# Altium PCB AMT103 Encoder Interface.PcbDoc
Units mm, origin at the board's own origin, x right, y up, seen from the top; angles counter-clockwise.
Board outline 39 x 30 mm, 4 copper layers (Components, GND, Supplies, Signals), stack 1.566 mm thick; 46 components, 37 nets, 200 pads, 95 vias.
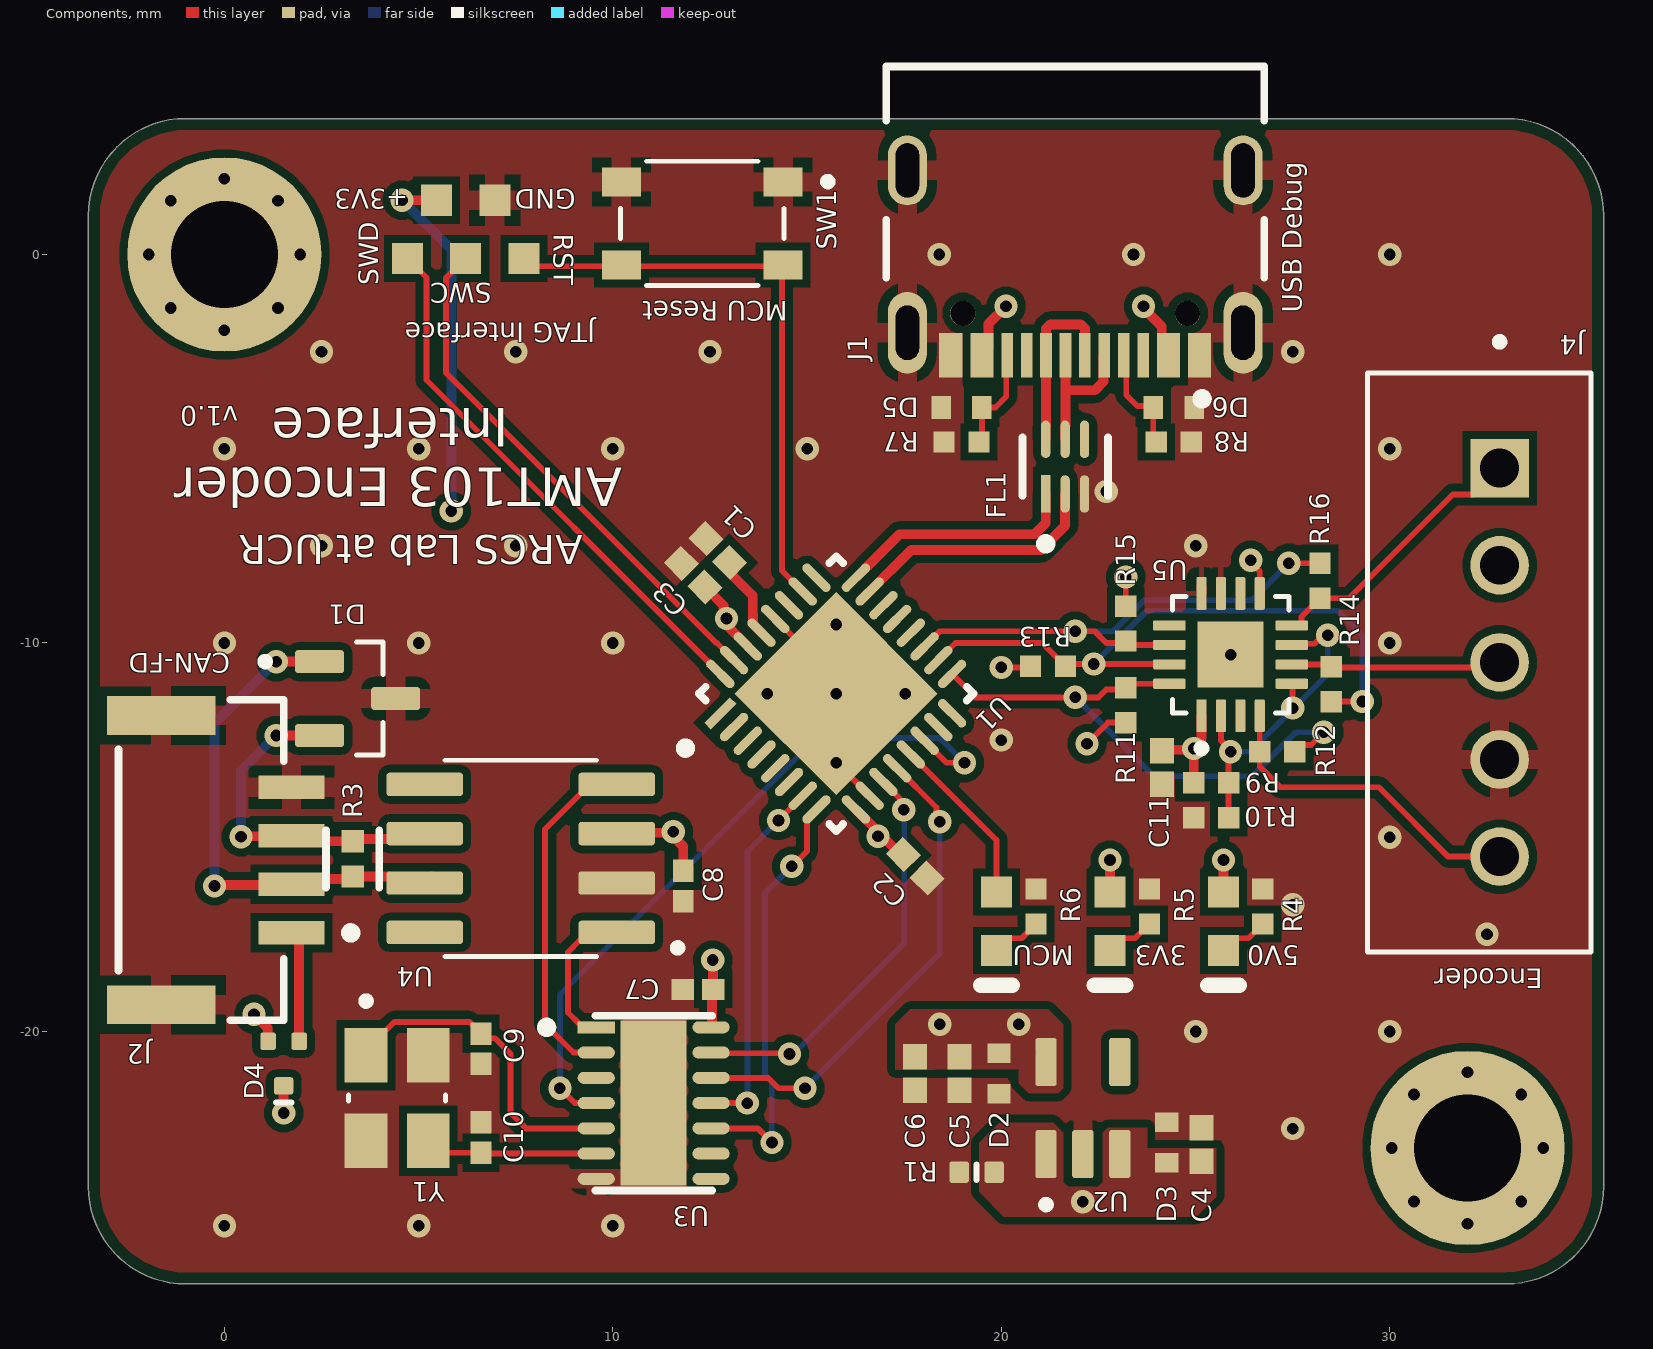
[diagram p0: Components view]
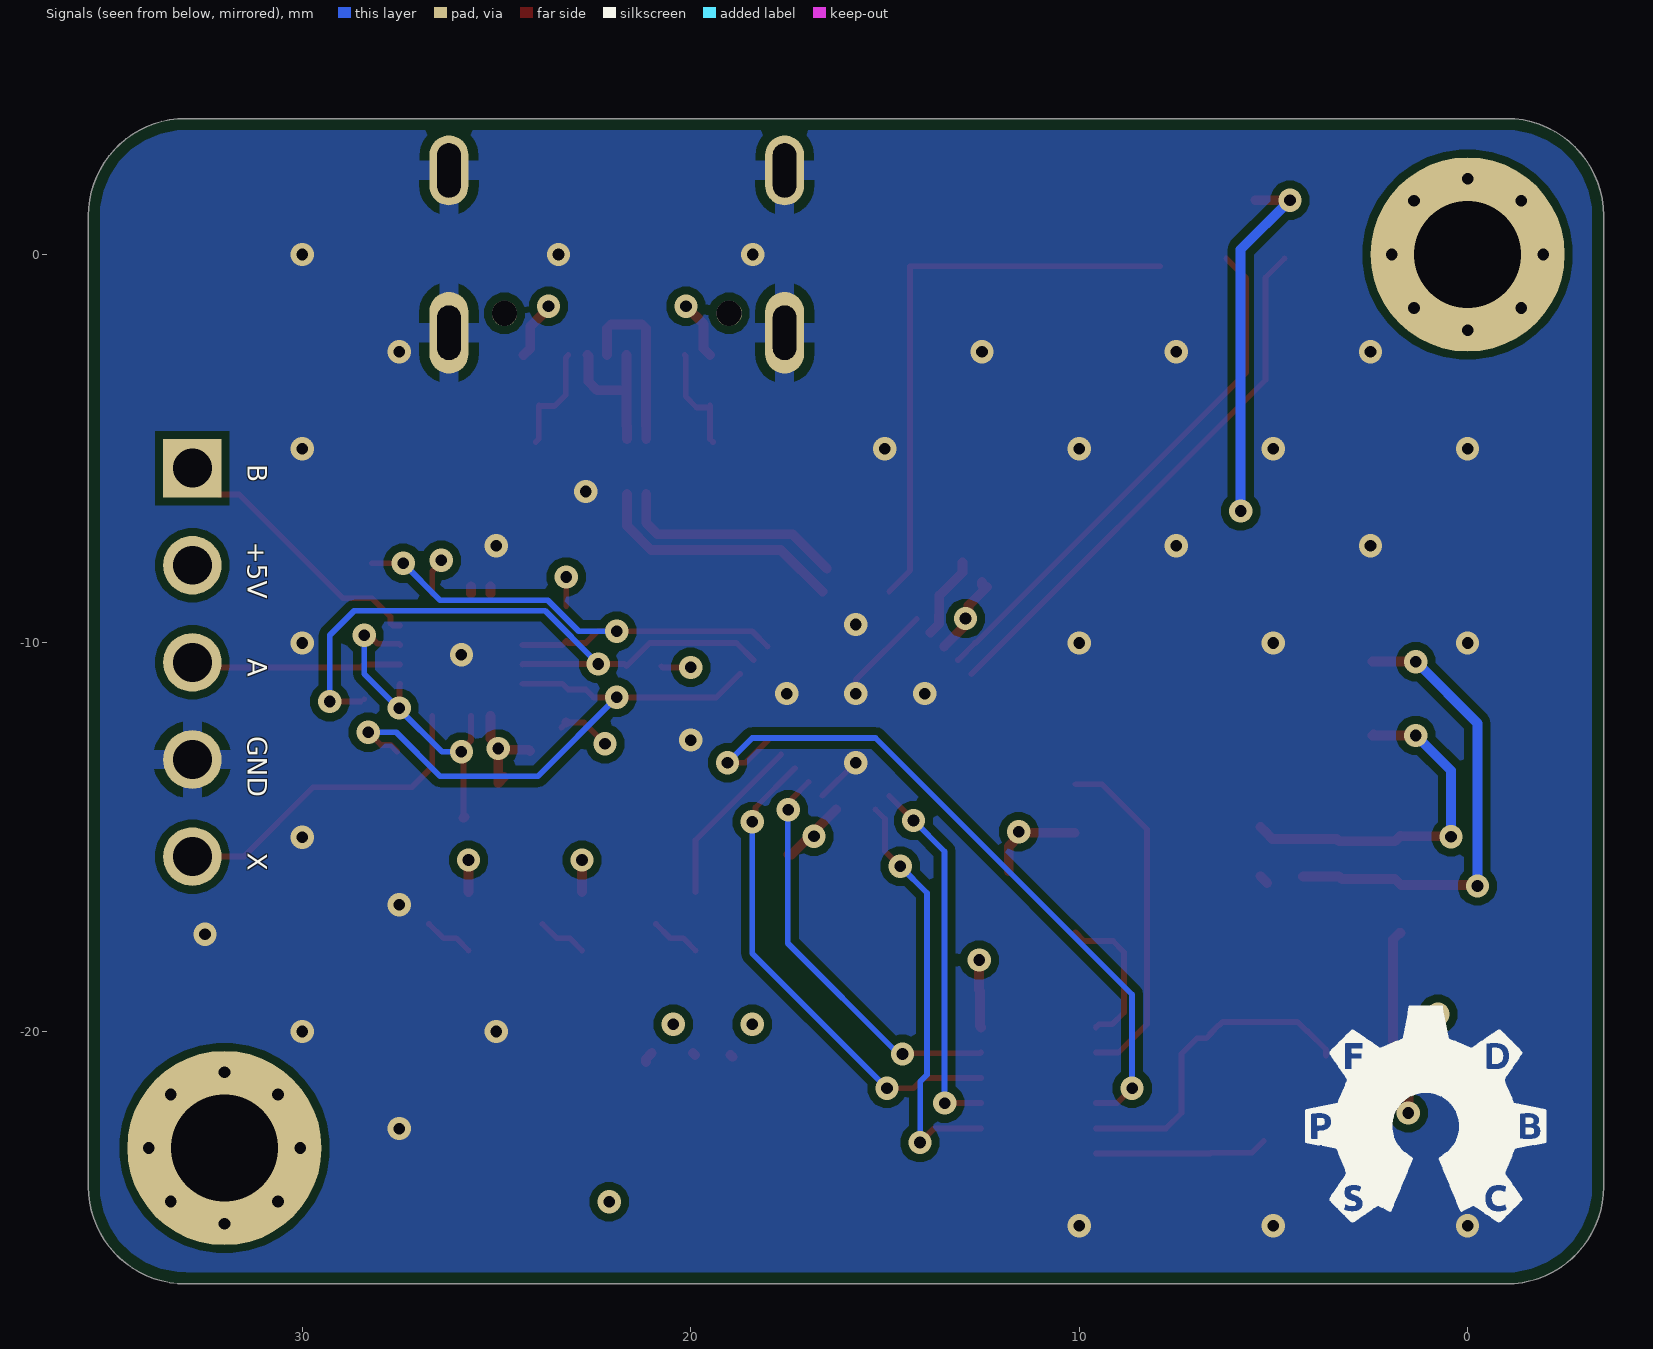
[diagram p1: Signals view, seen from below]
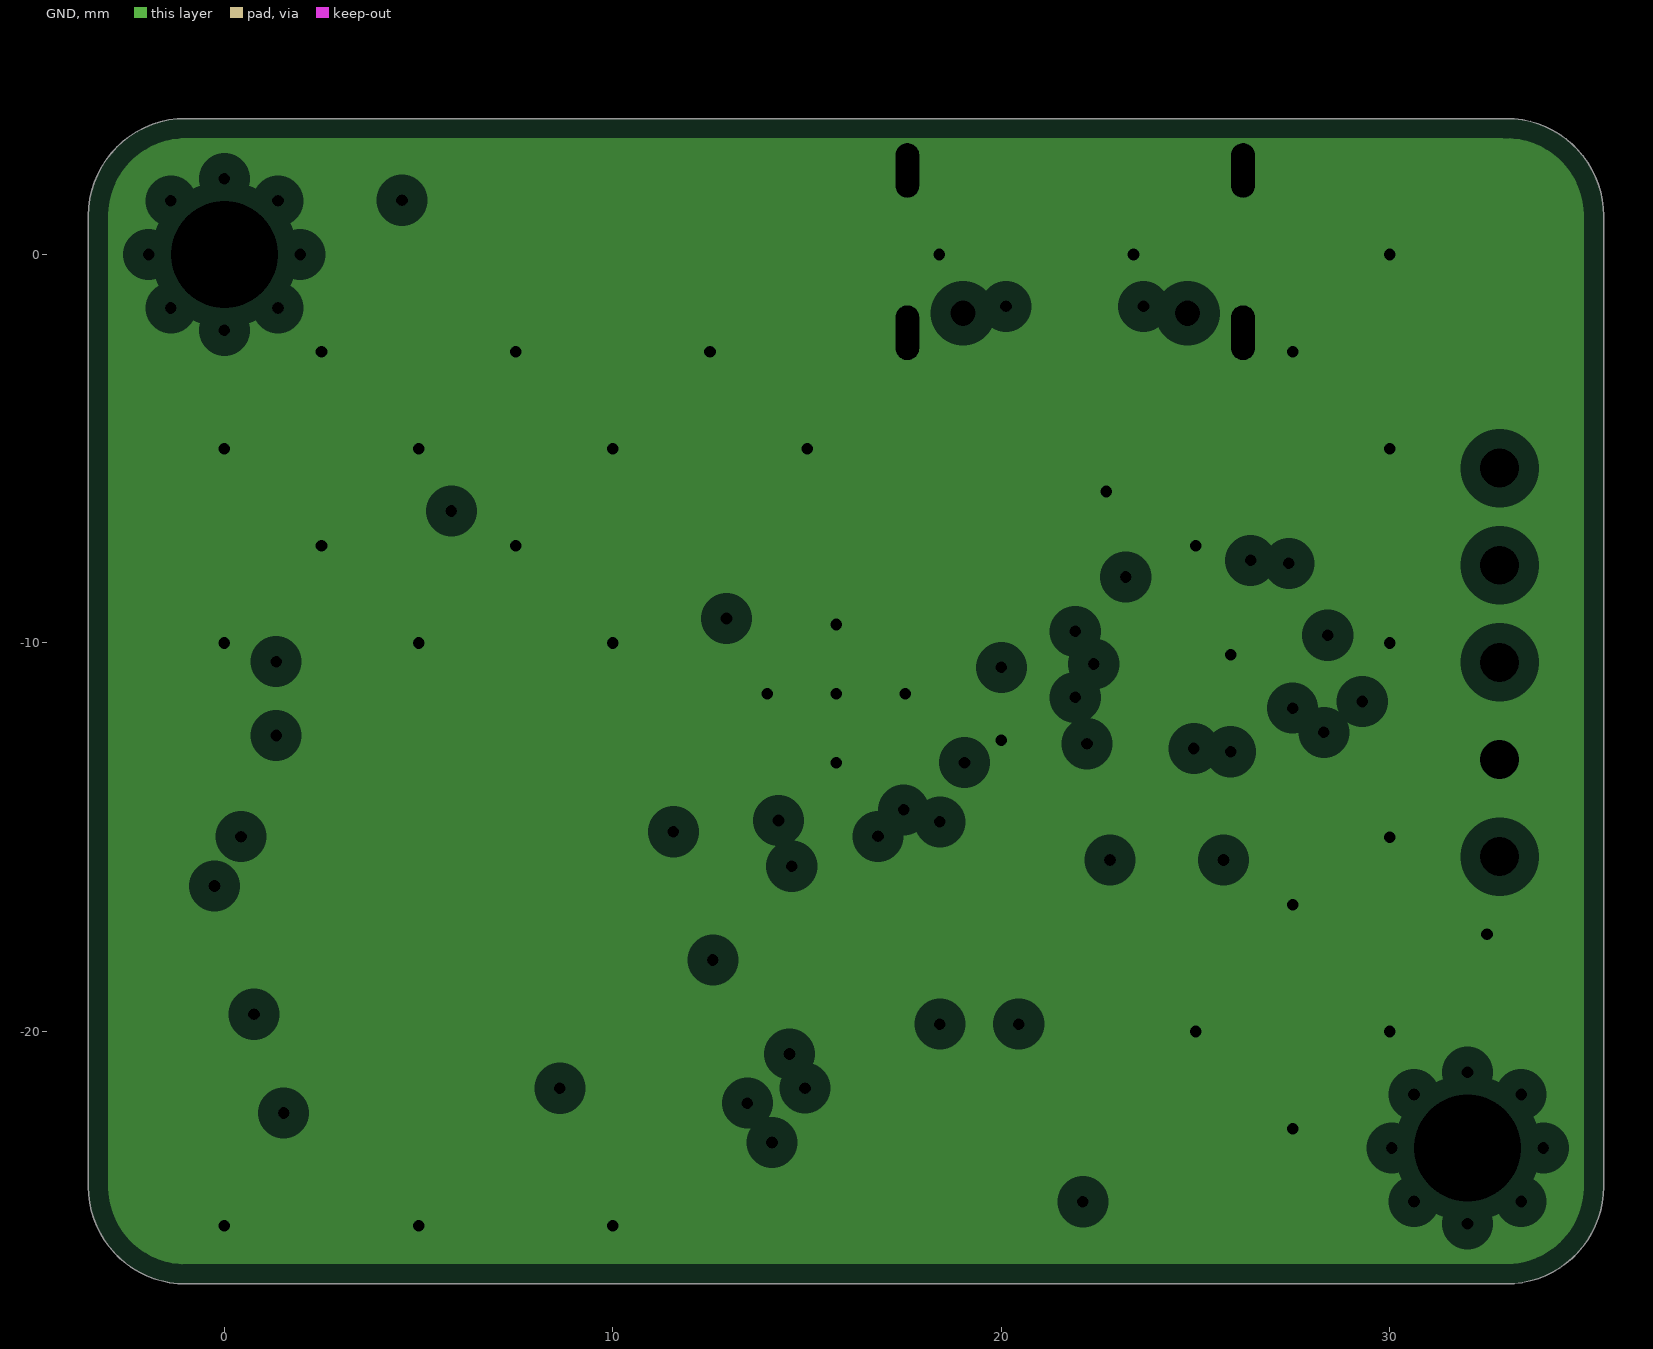
[diagram p2: GND, clearances drawn from the general rule]
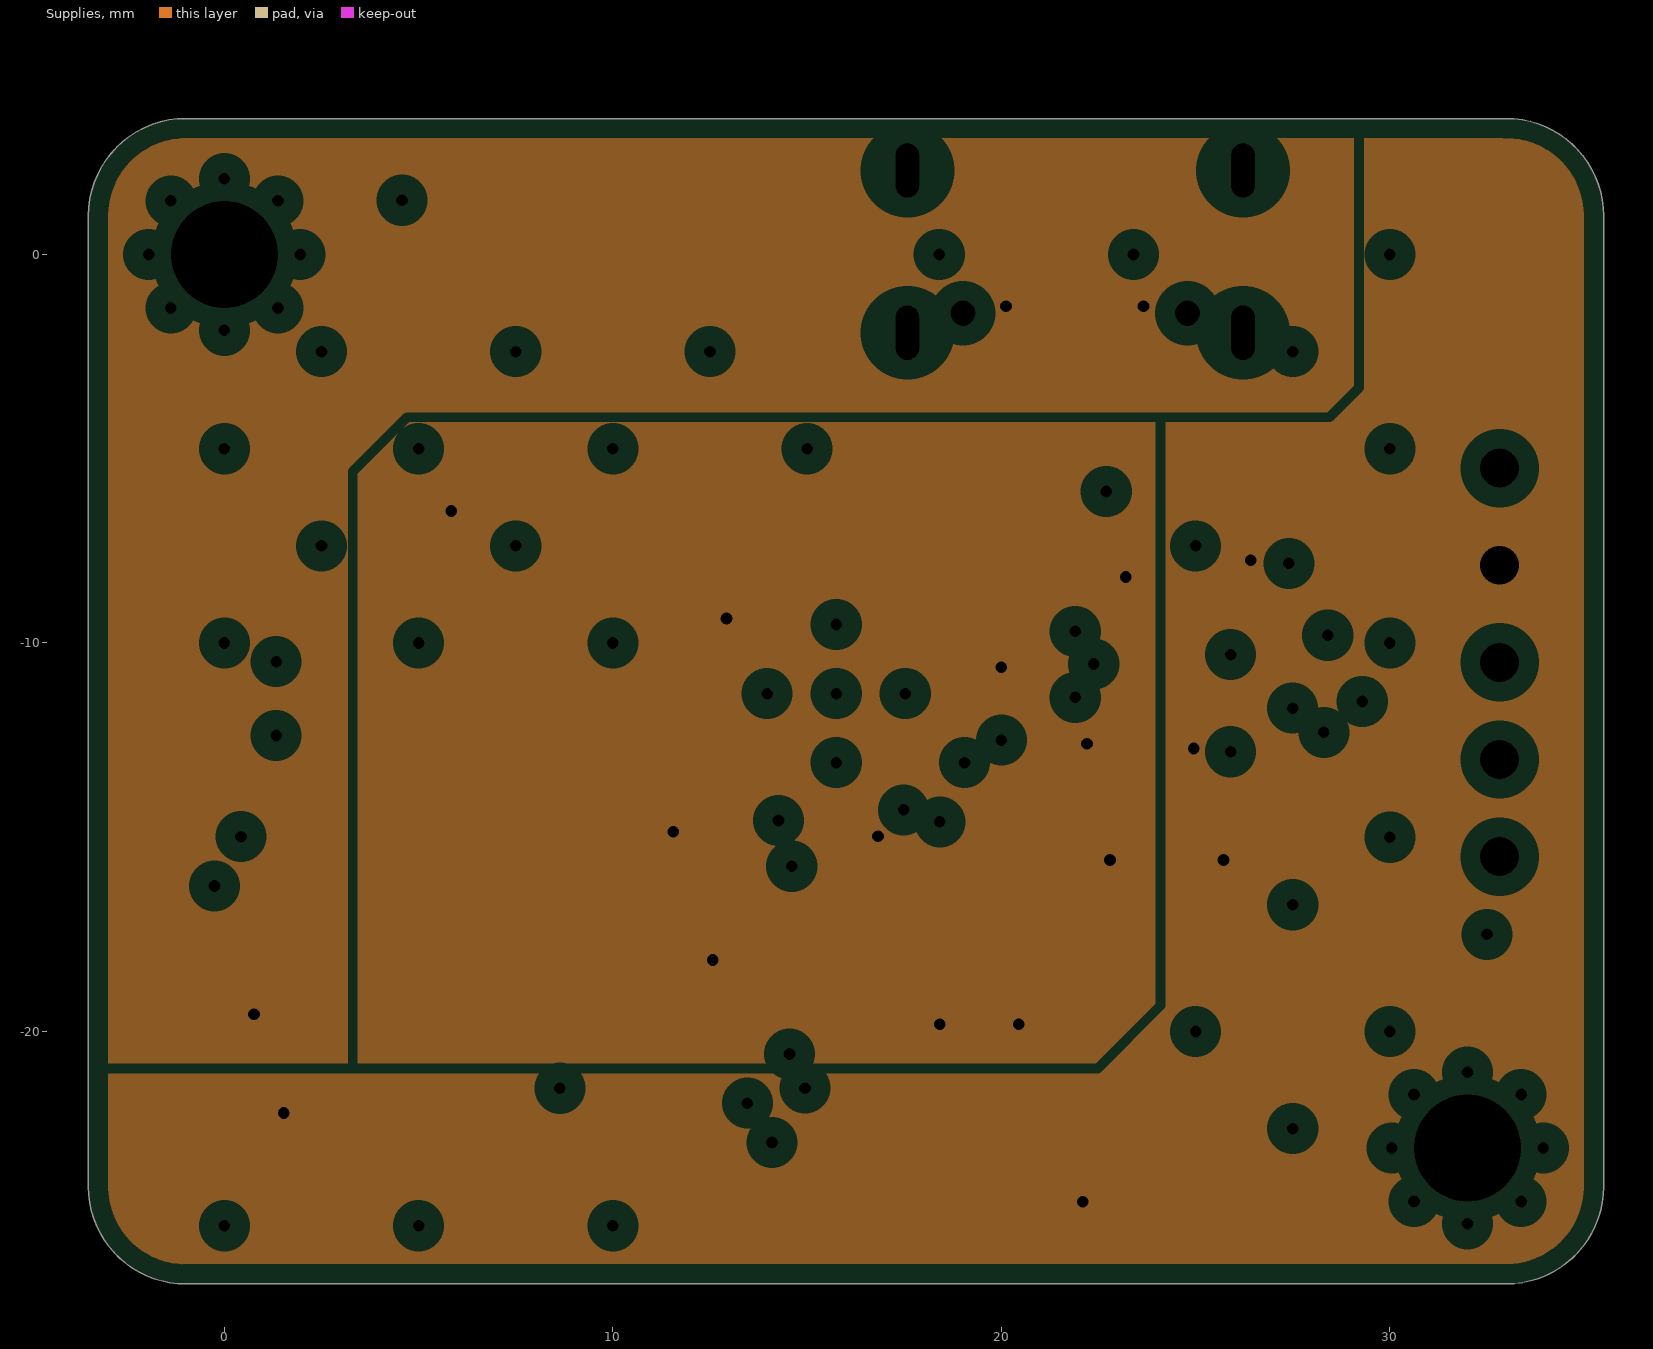
[diagram p3: Supplies, clearances drawn from the general rule]
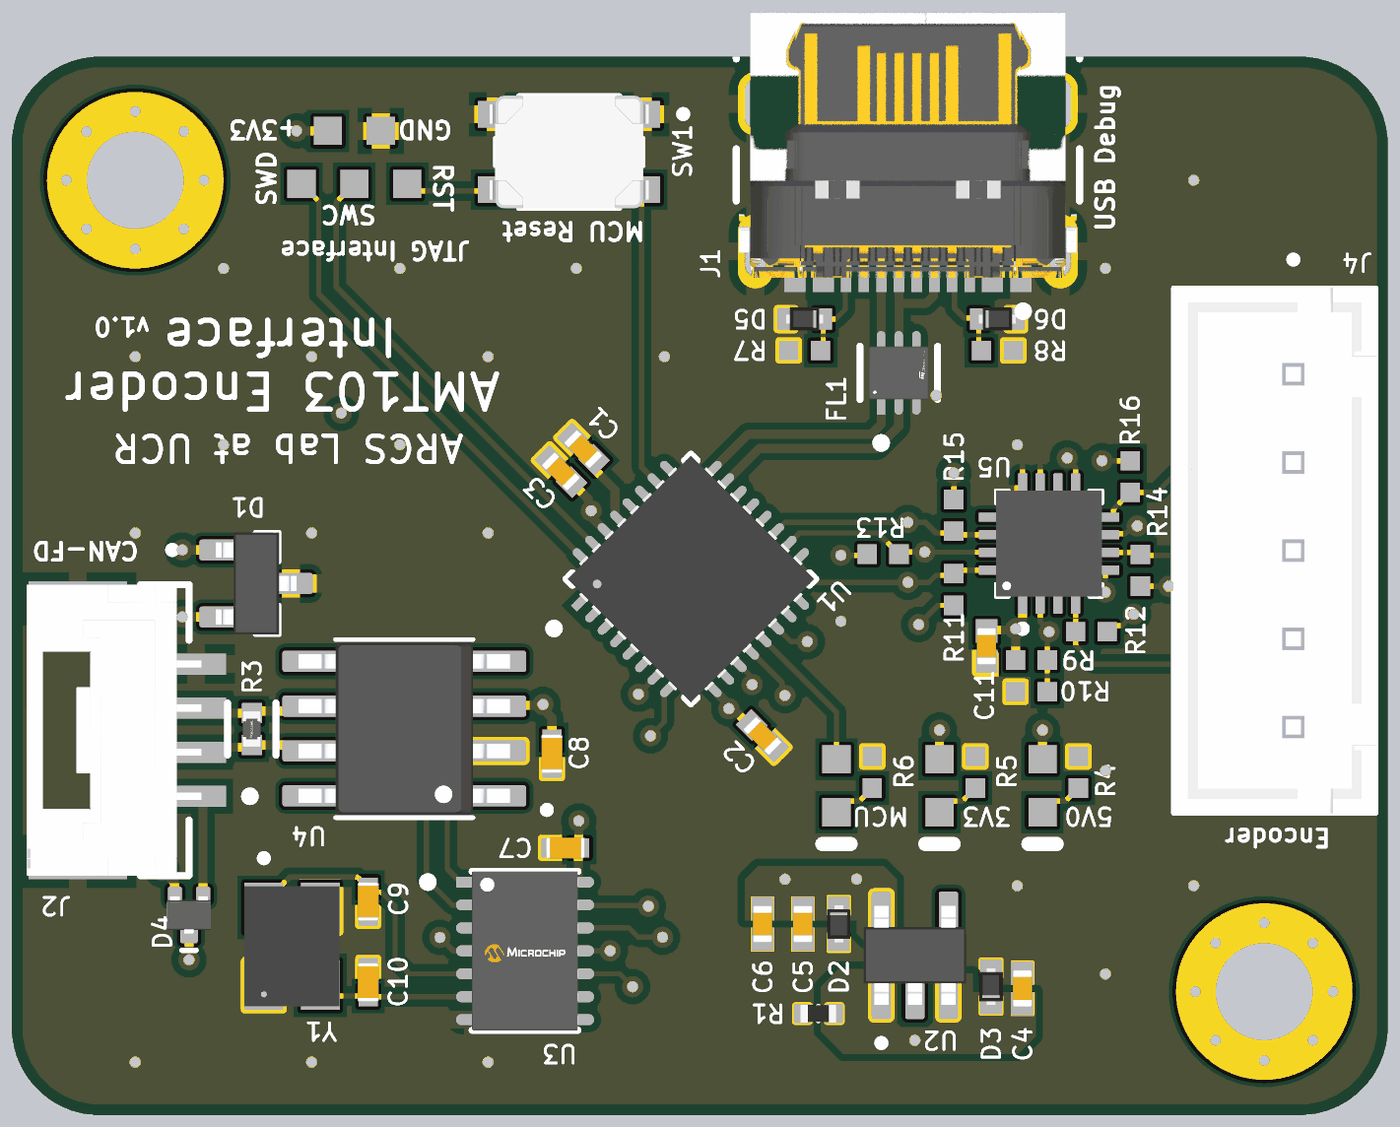
[diagram p4: 3D render of the assembled board from above, using the file's embedded part models]

## Layer stack, top to bottom
Top Solder: solder mask 0.0102, Solder Resist, Dk 3.5
Components: signal copper 0.035
Dielectric 2: prepreg 0.203, PP-022, Dk 4.5
GND: plane copper 0.03, net GND
Dielectric 1: core 1.03, Core-042, Dk 4.6
Supplies: plane copper 0.03, net (Multiple Nets)
Dielectric 3: prepreg 0.203, PP-022, Dk 4.5
Signals: signal copper 0.035
Bottom Solder: solder mask 0.0102, Solder Resist, Dk 3.5

## Board outline
-1,-26.5 cw(c-1,-24) -3.5,-24 -3.5,1 cw(c-1,1) -1,3.5 33.012,3.5 33,3.5 cw(c33,1) 35.5,1 35.5,-23.996 cw(c33,-23.996) 33,-26.496 33.02,-26.5

## Design rules (kind name [scope] priority, off if disabled: settings)
BoardOutlineClearance [All] p1: gap=0.3 ignorepadtopadclearanceinfootprint=FALSE except(0.4: Arc-SplitBarrior Arc-SplitContinuation Track-SplitBarrior Track-SplitContinuation SMDPad-SplitBarrior SMDPad-SplitContinuation THPad-SplitBarrior THPad-SplitContinuation Via-SplitBarrior Via-SplitContinuation Fill-SplitBarrior Fill-SplitContinuation Poly-SplitBarrior Poly-SplitContinuation Region-SplitBarrior Region-SplitContinuation Text-SplitBarrior Text-SplitContinuation)
Clearance "Clearance Different Nets" [All] p1: gap=0.2 ignorepadtopadclearanceinfootprint=FALSE except(0.089: Arc-Arc Arc-Track Arc-SMDPad Track-Track Track-SMDPad; 0.127: SMDPad-SMDPad SMDPad-Via THPad-Via Via-Via; 0.254: Arc-Via Arc-Text Track-Via Track-Text SMDPad-Text THPad-Text Via-Text Fill-Text Poly-Text Region-Text Text-Text; 0.5: THPad-THPad Via-Hole)
Clearance "Clearance Same Nets" [All] p2: gap=0.2 ignorepadtopadclearanceinfootprint=FALSE except(0.089: Arc-Arc Arc-Track Arc-SMDPad Track-Track Track-SMDPad SMDPad-SMDPad; 0.127: SMDPad-Via THPad-Via; 0.254: Arc-Via Arc-Text Track-Via Track-Text SMDPad-Text THPad-Text Via-Via Via-Text Fill-Text Poly-Text Region-Text Text-Text)
Clearance "Clearance Bottom Layer" [OnLayer('Bottom Layer')] p3: gap=0.203 ignorepadtopadclearanceinfootprint=TRUE except(0.254: Arc-Text Track-Text SMDPad-Text THPad-Text Via-Text Fill-Text Poly-Text Region-Text Text-Text)
Clearance "Clearance Top Layer" [OnLayer('Top Layer')] p4: gap=0.203 ignorepadtopadclearanceinfootprint=TRUE except(0.254: Arc-Text Track-Text SMDPad-Text THPad-Text Via-Text Fill-Text Poly-Text Region-Text Text-Text)
DiffPairsRouting [All] p1: maxlimit=0.254 minlimit=0.1 mostfreqgap=0.15 toplayer_minwidth=0.15 toplayer_maxwidth=0.254 toplayer_prefwidth=0.254 bottomlayer_minwidth=0.15 bottomlayer_maxwidth=0.254 bottomlayer_prefwidth=0.254 maxuncoupledlength=12.7
HoleSize [All] p1: absolutevalues=TRUE maxlimit=6.3 minlimit=0.2 maxpercent=80.000 minpercent=20.000
MinimumAnnularRing [All] p1: minimumring=0.13
MinimumSolderMaskSliver [All] p1: minsoldermaskwidth=0.1
PlaneClearance [All] p1: clearance=0.508
PlaneConnect [All] p1: planeconnectstyle=Relief reliefexpansion=0.508 reliefentries=4 reliefconductorwidth=0.254 reliefairgap=0.254
PolygonConnect PolygonConnect_1 [All] p1: thpad.connectstyle=Relief thpad.reliefconductorwidth=0.508 thpad.reliefentries=4 thpad.polygonreliefangle="90 Angle" thpad.airgapwidth=0.254 smdpad.connectstyle=Relief smdpad.reliefconductorwidth=0.508 smdpad.reliefentries=4 smdpad.polygonreliefangle="90 Angle" smdpad.airgapwidth=0.254 via.connectstyle=Direct via.reliefconductorwidth=0.508 via.reliefentries=4 via.polygonreliefangle="90 Angle" via.airgapwidth=0.254
RoutingCorners [All] p1: cornerstyle=Round minsetback=2.54 maxsetback=2.54
RoutingVias [All] p1: holewidth=0.5 width=1 viastyle="Through Hole" minholewidth=0.2 minwidth=0.35 maxholewidth=1 maxwidth=2
SilkToSilkClearance [All] p1: silktosilkclearance=0.1
SilkToSolderMaskClearance [IsPad] p1: minsilkscreentomaskgap=0.1 clearancetoexposedcopper=TRUE
SolderMaskExpansion [All] p1: expansion=0.102 istentingtop=FALSE
SupplyNets "Schematic Supply Nets_5" [InNet('2V5_VREF')] p1: voltage=0.000
SupplyNets "Schematic Supply Nets_4" [InNet('5V0_VBUS')] p2: voltage=0.000
SupplyNets "Schematic Supply Nets_3" [InNet('GND')] p3: voltage=0.000
SupplyNets "Schematic Supply Nets_2" [InNet('3V3_IO')] p4: voltage=0.000
SupplyNets "Schematic Supply Nets_1" [InNet('5V0_MAIN')] p5: voltage=0.000
SupplyNets "Schematic Supply Nets" [InNet('5V0_CAN')] p6: voltage=0.000
Width [All] p1: maxlimit=2.54 minlimit=0.089 preferedwidth=0.381
22 further rules are at their usual default settings.

## Classes and differential pairs
component class "Logic Level Shifting": C11 R9 R10 R11 R12 R13 R14 R15 R16 U5
component class "Power Supplies": C4 C5 C6 D2 D3 D4 R1 U2
component class MCU: C1 C2 C3 SW1 U1
component class IO: 3V3 5V0 D5 D6 FL1 J1 J2 J4 MCU R4 R5 R6 R7 R8
component class CAN-FD: C7 C8 C9 C10 D1 R3 U3 U4 Y1
differential pair USB_DIFF: +USB_D_P -USB_D_N

## Components (designator, comment, footprint, x,y, rotation, side; value= is the part's Value field where it differs from the comment)
3V3 "LTST-C190GKT" LTST-C190GKT_V 22.795,-17.164 r270 top (schematic designator DS2)
5V0 "LTST-C190GKT" LTST-C190GKT_V 25.716,-17.164 r270 top (schematic designator DS1)
C1 "GRM155Z71A105KE01D" CAPC1005X55X30NL05T10#1 12.7,-7.62 r135 top value=1µF
C2 "04025C104KAT4A" CAPC1005X55X30NL05T10#1 17.78,-15.748 r315 top value=100nF
C3 "04025C104KAT4A" CAPC1005X55X30NL05T10#1 12.065,-8.255 r135 top value=100nF
C4 "GRM155Z71A105KE01D" CAPC1005X55X30NL05T10#2 25.146,-22.909 r90 top value=1µF
C5 "GRM155Z71A105KE01D" CAPC1005X55X30NL05T10#2 18.923,-21.082 r270 top value=1µF
C6 "GRM155R61A106ME11J" CAPC1005X55X30NL05T10#2 17.78,-21.082 r270 top value=10uF
C7 "Capacitor 0.1 uF +/- 5% 16 V 0402" CAPC1005X56X25LL10T15 12.192,-18.923 r180 top value=100nF
C8 "Capacitor 0.1 uF +/- 5% 16 V 0402" CAPC1005X56X25LL10T15 11.811,-16.256 r270 top value=100nF
C9 "Capacitor 0.1 uF +/- 5% 16 V 0402" CAPC1005X56X25LL10T15 6.604,-20.447 r270 top value=22pF
C10 "Capacitor 0.1 uF +/- 5% 16 V 0402" CAPC1005X56X25LL10T15 6.604,-22.733 r90 top value=22pF
C11 "04025C104KAT4A" CAPC1005X55X30NL05T10#1 24.13,-13.208 r270 top value=100nF
D1 "PESD2CANFD24V" SOT95P230X110-3N 3.429,-11.43 r0 top
D2 "CPDQ5V0" MBTB-D-SOD-923F-IMP-0402#1 19.939,-21.082 r270 top
D3 "CPDQ5V0" MBTB-D-SOD-923F-IMP-0402#1 24.257,-22.86 r90 top
D4 "NSR30CM3T5G" ONSC-SOT-723-3-631AA-01_C_V 1.524,-20.828 r270 top
D5 "CPDQ5V0" MBTB-D-SOD-923F-IMP-0402#2 18.974,-3.937 r180 top
D6 "CPDQ5V0" MBTB-D-SOD-923F-IMP-0402#2 24.435,-3.937 r0 top
FL1 "ECMF02-2AMX6" FP-QFN-6L-IPC_A 21.641,-5.461 r90 top
J1 "USB4105-GF-A" FP-USB4105-GF-A-MFG 21.9,1 r180 top locked
J2 "BM04B-GHS-TBT" FP-BM04B-GHS-TBT_LF_SN-MFG -0.6,-15.588 r270 top locked
J4 "B5B-XH-A" JST_B5B-XH-A 32.3,-10.5 r90 top locked
MCU "LTST-C190GKT" LTST-C190GKT_V 19.874,-17.164 r270 top (schematic designator DS3)
R1 "100KR2F" RESC0402(1005)_L 19.362,-23.622 r180 top value=100k
R3 "ERJ-2RKF3002X" FP-ERJ2RK-IPC_B 3.302,-15.557 r90 top value=120
R4 "ERJ-2RKF1430X" RESC1005X40X25NL05T05 26.732,-16.783 r90 top value=220
R5 "CRCW040259R0FKED" RESC1005X40X25NL05T05 23.811,-16.783 r90 top value=220
R6 "CRCW040259R0FKED" RESC1005X40X25NL05T05 20.89,-16.783 r90 top value=220
R7 "MCS04020C5101FE000" RESC1005X40X25NL05T05 18.974,-4.826 r180 top value=5.1k
R8 "MCS04020C5101FE000" RESC1005X40X25NL05T05 24.435,-4.826 r0 top value=5.1k
R9 "MCS04020C5101FE000" RESC1005X40X25NL05T05 25.4,-13.6 r0 top value=10k
R10 "MCS04020C5101FE000" RESC1005X40X25NL05T05 25.4,-14.5 r180 top value=10k
R11 "MCS04020C5101FE000" RESC1005X40X25NL05T05 23.2,-11.6 r90 top value=10k
R12 "MCS04020C5101FE000" RESC1005X40X25NL05T05 27.1,-12.8 r0 top value=10M
R13 "MCS04020C5101FE000" RESC1005X40X25NL05T05 21.2,-10.6 r0 top value=10k
R14 "MCS04020C5101FE000" RESC1005X40X25NL05T05 28.491,-11.059 r270 top value=10M
R15 "MCS04020C5101FE000" RESC1005X40X25NL05T05 23.2,-9.5 r270 top value=10k
R16 "MCS04020C5101FE000" RESC1005X40X25NL05T05 28.2,-8.4 r90 top value=10M
SW1 "TL3365AF180QG" SW_TL3365AF180QG 12.3,0.8 r180 top locked
U1 "ATSAMD21E18A-MU" FP-PG-IPC_A 15.748,-11.303 r45 top locked
U2 "NCP718BSN330T1G" SOT95P280X100-5N 22.098,-21.971 r90 top locked
U3 "MCP2518FDT-H/QBB" FP-C04-21361-IPC_A 11.049,-21.844 r0 top
U4 "TCAN332GDR" "Copy of SOIC127P599X175-8N" 7.626,-15.544 r180 top
U5 "TSX339IQ4T" QFN50P300X300X100-16N 25.9,-10.3 r90 top locked
Y1 "RH100-40.000-18-F-2050-TR" XTAL_RH100-40.000-18-F-2050-TR 4.445,-21.717 r270 top

## Footprints (in the part's own frame and the unit in brackets; to place one, negate y for a bottom-side part, rotate by r counter-clockwise, add the part's x,y. Pads: shape width x height; smd on the part's side, far side on the other; paste and mask are expansions set on the pad)
CAPC1005X55X30NL05T10#1 [mm] "Chip Capacitor, 2-Leads, Body 1.05x0.55mm, IPC Medium Density"
  rect 0.66x0.62 smd: 1(-0.43,0) 2(0.43,0)
  body extent -0.53,-0.28 0.53,0.28, height 0.55
CAPC1005X55X30NL05T10#2 [mm] "Chip Capacitor, 2-Leads, Body 1.05x0.55mm, IPC Medium Density"
  rect 0.66x0.62 smd mask+0.025: 1(-0.43,0) 2(0.43,0)
  body extent -0.53,-0.28 0.53,0.28, height 0.55
CAPC1005X56X25LL10T15 [mm] "Chip Capacitor, 2-Leads, Body 1.10x0.60mm, IPC High Density"
  rect 0.58x0.54 smd: 1(-0.39,0) 2(0.39,0)
  body extent -0.55,-0.3 0.55,0.3, height 0.56
"Copy of SOIC127P599X175-8N" [mm]
  rrect25% 1.97x0.6 smd: 1(-2.47,1.905) 2(-2.47,0.635) 3(-2.47,-0.635) 4(-2.47,-1.905) 5(2.47,-1.905) 6(2.47,-0.635) 7(2.47,0.635) 8(2.47,1.905)
  silkscreen extent -4.14,-2.52 1.95,2.52, body extent -3,-2.45 3,2.45, height 1.75
FP-BM04B-GHS-TBT_LF_SN-MFG [mm]
  rect 0.6x1.7 smd paste+0 mask+0: 1(1.875,2.325) 2(0.625,2.325) 3(-0.625,2.325) 4(-1.875,2.325)
  rect 1x2.8 smd paste+0 mask+0: 5(-3.725,-1.025) 6(3.725,-1.025)
  silkscreen extent -4.13,-2.12 4.13,3.98, body extent -4.33,-2.52 4.33,3.27, height 0.25
FP-C04-21361-IPC_A [mm]
  rect 0.956x0.312 smd paste+0 mask+0: 1(-1.478,1.95)
  rrect100% 0.956x0.312 smd paste+0 mask+0: 2(-1.478,1.3) 3(-1.478,0.65) 4(-1.478,0) 5(-1.478,-0.65) 6(-1.478,-1.3) 7(-1.478,-1.95) 8(1.478,-1.95) 9(1.478,-1.3) 10(1.478,-0.65) 11(1.478,0) 12(1.478,0.65) 13(1.478,1.3) 14(1.478,1.95)
  rect 1.7x4.25 smd paste-1000 mask+0: 15(0,0)
  silkscreen extent -2.88,-2.25 1.5,2.25, body extent -2.46,-2.75 2.46,2.75, height 0.25
FP-ERJ2RK-IPC_B [mm]
  rect 0.568x0.572 smd paste+0: 1(-0.452,0) 2(0.452,0)
  silkscreen extent -0.74,-0.69 0.74,0.69, body extent -0.89,-0.44 0.89,0.44, height 0.25
FP-PG-IPC_A [mm]
  rect 0.935x0.239 smd paste+0 mask+0: 1(-2.468,1.75)
  rrect100% 0.935x0.239 smd paste+0 mask+0: 2(-2.468,1.25) 3(-2.468,0.75) 4(-2.468,0.25) 5(-2.468,-0.25) 6(-2.468,-0.75) 7(-2.468,-1.25) 8(-2.468,-1.75) 17(2.468,-1.75) 18(2.468,-1.25) 19(2.468,-0.75) 20(2.468,-0.25) 21(2.468,0.25) 22(2.468,0.75) 23(2.468,1.25) 24(2.468,1.75)
  rrect100% 0.239x0.935 smd paste+0 mask+0: 9(-1.75,-2.468) 10(-1.25,-2.468) 11(-0.75,-2.468) 12(-0.25,-2.468) 13(0.25,-2.468) 14(0.75,-2.468) 15(1.25,-2.468) 16(1.75,-2.468) 25(1.75,2.468) 26(1.25,2.468) 27(0.75,2.468) 28(0.25,2.468) 29(-0.25,2.468) 30(-0.75,2.468) 31(-1.25,2.468) 32(-1.75,2.468)
  rect 3.7x3.7 smd paste-1000 mask+0: 33(0,0)
  silkscreen extent -3.86,-2.5 2.5,2.5, body extent -2.55,-2.55 2.55,2.55, height 1.65
FP-QFN-6L-IPC_A [mm]
  rect 0.965x0.239 smd paste+0 mask+0: 1(-0.704,0.5)
  rrect100% 0.965x0.239 smd paste+0 mask+0: 2(-0.704,0) 3(-0.704,-0.5) 4(0.704,-0.5) 5(0.704,0) 6(0.704,0.5)
  silkscreen extent -2.11,-1.1 0.75,1.1, body extent -1.69,-1.35 1.69,1.35, height 0.25
FP-USB4105-GF-A-MFG [mm]
  rrect100% 1x2.1 hole 0.6 slot 1.4 at 90 deg paste-2539.97 mask+0: 1(-4.32,3.015) 2(4.32,3.015)
  rrect100% 1x1.8 hole 0.6 slot 1.4 at 90 deg paste-2539.97 mask+0: 3(-4.32,-1.165) 4(4.32,-1.165)
  rect 0.6x1.15 smd paste+0 mask+0: A1-B12(-3.2,3.59) A4-B9(-2.4,3.59) B1-A12(3.2,3.59) B4-A9(2.4,3.59)
  rect 0.3x1.15 smd paste+0 mask+0: A5(-1.25,3.59) A6(-0.25,3.59) A7(0.25,3.59) A8(1.25,3.59) B5(1.75,3.59) B6(0.75,3.59) B7(-0.75,3.59) B8(-1.75,3.59)
  round 0.65 hole 0.65 unplated paste-2539.97 mask+0: ""(-2.89,2.515) ""(2.89,2.515)
  silkscreen extent -4.86,-3.84 4.86,4.84, body extent -4.96,-3.94 4.96,4.27, height 0.25
JST_B5B-XH-A [mm]
  rect 1.508x1.508 / inner round 1.508 / far side rect 1.508x1.508 hole 1: 1(5,-0.525)
  round 1.508 hole 1: 2(2.5,-0.525) 3(0,-0.525) 4(-2.5,-0.525) 5(-5,-0.525)
  silkscreen extent -7.45,-2.88 8.35,2.88, body extent -7.45,-2.88 7.45,2.88, height 7
LTST-C190GKT_V [mm] "SMD, 2-Leads, Body 1.6x0.8mm"
  rect 0.8x0.8 smd: 1(-0.75,0) 2(0.75,0)
  silkscreen extent 1.65,-0.4 1.65,0.4, body extent -0.8,-0.4 0.8,0.4, height 0.9
MBTB-D-SOD-923F-IMP-0402#1 [mm]
  rect 0.5x0.6 smd mask+0.05: 1(-0.525,0) 2(0.525,0)
  body extent -0.52,-0.33 0.52,0.33, height 0.82
MBTB-D-SOD-923F-IMP-0402#2 [mm]
  rect 0.5x0.6 smd: 1(-0.525,0) 2(0.525,0)
  body extent -0.52,-0.33 0.52,0.33, height 0.82
ONSC-SOT-723-3-631AA-01_C_V [mm] "SOT23, 3-Leads, Body 1.25x0.85mm, Pitch 0.4mm"
  rrect30% 0.45x0.4 smd: 1(-0.575,0.4) 2(-0.575,-0.4)
  rrect30% 0.45x0.5 smd: 3(0.575,0)
  silkscreen extent 1,-0.2 1,0.2, body extent -0.53,-0.63 0.53,0.63, height 0.45
QFN50P300X300X100-16N [mm]
  rect 0.84x0.26 smd: 1(-1.575,0.75)
  rrect25% 0.84x0.26 smd: 2(-1.575,0.25) 3(-1.575,-0.25) 4(-1.575,-0.75) 9(1.575,-0.75) 10(1.575,-0.25) 11(1.575,0.25) 12(1.575,0.75)
  rrect25% 0.26x0.84 smd: 5(-0.75,-1.575) 6(-0.25,-1.575) 7(0.25,-1.575) 8(0.75,-1.575) 13(0.75,1.575) 14(0.25,1.575) 15(-0.25,1.575) 16(-0.75,1.575)
  rect 1.7x1.7 smd: 17(0,0)
  silkscreen extent -2.49,-1.5 1.5,1.5, body extent -1.5,-1.5 1.5,1.5, height 1
RESC0402(1005)_L [mm] "Chip Resistor, Body 1.0x0.5mm, IPC High Density"
  rrect25% 0.5x0.55 smd mask+0.05: 1(-0.45,0) 2(0.45,0)
  silkscreen extent 0,-0.2 0,0.2, body extent -0.5,-0.25 0.5,0.25, height 0.3
RESC1005X40X25NL05T05 [mm] "Chip Resistor, 2-Leads, Body 1.00x0.50mm, IPC Medium Density"
  rect 0.55x0.55 smd: 1(-0.45,0) 2(0.45,0)
  body extent -0.53,-0.27 0.53,0.28, height 0.4
SOT95P230X110-3N [mm]
  rrect25% 1.26x0.59 smd: 1(-0.98,0.95) 2(-0.98,-0.95) 3(0.98,0)
  silkscreen extent -2.48,-1.45 0.65,1.45, body extent -1.15,-1.45 1.15,1.45, height 1.1
SOT95P280X100-5N [mm]
  rrect25% 1.24x0.55 smd: 1(-1.185,0.95) 2(-1.185,0) 3(-1.185,-0.95) 4(1.185,-0.95) 5(1.185,0.95)
  silkscreen extent -2.58,0.85 -2.39,1.05, body extent -1.4,-1.45 1.4,1.45, height 0.98
SW_TL3365AF180QG [mm]
  rect 1x0.75 smd: 1(-2.083,-1.067) 2(2.083,-1.067) 3(-2.083,1.067) 4(2.083,1.067)
  silkscreen extent -3.33,-1.6 2.1,1.6, body extent -2.25,-1.6 2.25,1.6, height 2.5
XTAL_RH100-40.000-18-F-2050-TR [mm]
  rect 1.4x1.1 smd: 1(-1.1,-0.8) 2(1.1,-0.8) 3(1.1,0.8) 4(-1.1,0.8)
  silkscreen extent -2.6,-1.25 0.08,1.25, body extent -1.7,-1.35 1.7,1.35, height 0.81

## Part data
3V3 5V0 MCU: library part CMP-007-00022-2, "LED Uni-Color Green, 100 mW, 30 mA, -55 to 85 degC, 2-Pin SMD, RoHS, Tape and Reel", Case/Package=0603, Colour=Green, Forward Current=20mA, Forward Voltage=2.1V, Manufacturer=Lite-On, Max Operating Temperature=85°C, Min Operating Temperature=-55°C, Package Description="2-Pin Surface Mount Device, Body 1.6 x 0.8 mm", Package Quantity=3000, Package Reference=C190GKT, Power=100mW, Datasheet URL=http://datasheet.octopart.com/LTST-C190GKT-Lite-On-datasheet-158530.pdf, Datasheet Version=Dec-06, Illumination Colour=Green, Lens Style=Clear, Luminous Intensity=6mcd, Manufacturer URL=http://www.us.liteon.com/, Mounting Technology=SM, Nominal Vf=2.1V, Packaging=TapeandReel, Pins=2, RoHS Compliant=True, Viewing Angle=130degrees
C1 C4 C5: library part CMP-001-00092-1, "Ceramic Capacitor, Multilayer, Ceramic, 10V, 10% +Tol, 10% -Tol, X7R, 15% TC, 1uF, Surface Mount, 0402", Capacitor Type=X7R, Case/Package=0402, Max Operating Temperature=125°C, Min Operating Temperature=-55°C, Tolerance=10%, Voltage Rating=10V, Mounting Technology="Surface Mount", Pins=2, RoHS Compliant=Yes
C2 C3 C11: library part CMP-001-00090-1, "Ceramic Capacitor, Multilayer, Ceramic, 50V, 10% +Tol, 10% -Tol, X7R, 15% TC, 0.1uF, Surface Mount, 0402", Capacitor Type=X7R, Case/Package=0402, Tolerance=10%, Voltage Rating=50V, Pins=2, RoHS Compliant=Yes
C6: library part CMP-001-00091-1, "Ceramic Capacitor, Multilayer, Ceramic, 10V, 20% +Tol, 20% -Tol, X5R, 15% TC, 10uF, Surface Mount, 0402", Capacitor Type=X5R, Case/Package=0402, Tolerance=20%, Voltage Rating=10V
C7 C8: library part CMP-001-00001-9, "Chip Capacitor, 0.1 uF, +/- 5%, 16 V, 0402 (1005 Metric)", Capacitor Type=X7R, Case/Package=0402, Max Operating Temperature=125°C, Min Operating Temperature=-55°C, Tolerance=10%, Voltage Rating=16V, Mounting Technology=SM, Pins=2, RoHS Compliant=True
C9 C10: library part CMP-001-00001-9, "Chip Capacitor, 0.1 uF, +/- 5%, 16 V, 0402 (1005 Metric)", Capacitor Type=C0G/NP0, Case/Package=0402, Max Operating Temperature=125°C, Min Operating Temperature=-55°C, Tolerance=1%, Voltage Rating=50V, Mounting Technology=SM, Pins=2, RoHS Compliant=True
D1: library part CMP-004-00043-1, "Trans Voltage Suppressor Diode, 24V V(RWM), Bidirectional, 2 Element, Silicon, TO-236AB", RoHS Compliant=Yes
D2 D3 D5 D6: library part CMP-004-00042-2, "18.6V Clamp 9.4A (8/20Âµs) Ipp Tvs Diode Surface Mount 0402/SOD-923F", Case/Package="0402 Comchip", Availability=Good, Check_prices=https://www.snapeda.com/parts/CPDQ5V0-HF/Comchip%20Technology/view-part/809934/?ref=eda, Component Type=Standard, Design Item ID=CPDQ5V0-HF, MF="Comchip Technology", MP=CPDQ5V0-HF, Pins=2, Price=None, Purchase-URL=https://pricing.snapeda.com/search/part/CPDQ5V0-HF/?ref=eda, SnapEDA_Link=https://www.snapeda.com/parts/CPDQ5V0-HF/Comchip%20Technology/view-part/809934/?ref=snap, Source=CPDQ5V0-HF.SchLib
D4: library part CMP-004-00026-3, "Dual Common Cathode Schottky Barrier Diodes, 3-Pin SOT-723, Pb-Free, Tape and Reel", ComponentLink1Description="Manufacturer URL", ComponentLink1URL=http://www.onsemi.com/, ComponentLink2Description=Datasheet, ComponentLink2URL=http://www.onsemi.cn/pub_link/Collateral/NSR30CM3T5G-D.PDF, ComponentLink3Description="Package Specification", ComponentLink3URL=http://www.onsemi.cn/pub_link/Collateral/BAT54M3-D.PDF, Mounting Technology=SMT, Pins=3
FL1: library part CMP-00030-00005-1, "Data Line Filter, 2 Function(s), 6 Pin(s), Plastic", Max Operating Temperature=85°C, Min Operating Temperature=-40°C, Mounting Technology="Surface Mount", Pins=6, RoHS Compliant=Yes
J1: library part CMP-002-00095-3, "Conn USB 2.0 Type C RCP 24 POS 0.3mm/0.5mm Solder RA SMD 24 Terminal 1 Port T/R"
J2: library part CMP-002-00096-2, "Conn Shrouded Header HDR 4 POS 1.25mm Solder ST Top Entry SMD T/R"
J4: library part CMP-002-00099-1, "Connector Header, XH Series, 5 Position, 2.50mm, Through Hole, Press-Fit, Solder, Natural"
R1: library part CMP-009-00064-2, "100K 0.063W 1% 0402 (1005 Metric)  SMD", Case/Package=0402, Power=63mW, Tolerance=1%, Mounting Technology=SMT, Pins=2
R3: library part CMP-009-00190-1, "Fixed Resistor, Metal Glaze/thick Film, 0.1W, 30000ohm, 50V, 1% +/-Tol, 100ppm/Cel, Surface Mount, 0402", Case/Package=0402, Max Operating Temperature=155°C, Min Operating Temperature=-55°C, Power=100mW, Tolerance=1%, Mounting Technology="Surface Mount", Pins=2, RoHS Compliant=Yes
R4: library part CMP-009-00208-1, "Fixed Resistor, Metal Glaze/thick Film, 0.1W, 143ohm, 50V, 1% +/-Tol, 100ppm/Cel, Surface Mount, 0402", Case/Package=0402, Max Operating Temperature=155°C, Min Operating Temperature=-55°C, Power=100mW, Tolerance=1%, Mounting Technology="Surface Mount", Pins=2, RoHS Compliant=Yes
R5 R6: library part CMP-009-00207-1, "Fixed Resistor, Metal Glaze/thick Film, 0.063W, 59ohm, 50V, 1% +/-Tol, 100ppm/Cel, Surface Mount, 0402", Case/Package=0402, Max Operating Temperature=155°C, Min Operating Temperature=-55°C, Power=63mW, Tolerance=1%, Mounting Technology="Surface Mount", Pins=2, RoHS Compliant=Yes
R7 R8 R9 R10 R11 R12 R13 R14 R15 R16: library part CMP-009-00205-1, "Fixed Resistor, Thin Film, 0.063W, 5100ohm, 50V, 1% +/-Tol, 50ppm/Cel, Surface Mount, 0402", Case/Package=0402, Max Operating Temperature=125°C, Min Operating Temperature=-55°C, Power=63mW, Tolerance=1%, Mounting Technology="Surface Mount", Pins=2, RoHS Compliant=Yes
SW1: library part CMP-011-00019-2, "Tactile Switch SPST-NO Top Actuated Surface Mount", Case/Package=None, Availability="In Stock", Check_prices=https://www.snapeda.com/parts/TL3365AF180QG/E-Switch/view-part/?ref=eda, Component Type=Standard, Design Item ID=TL3365AF180QG, MF=E-Switch, MP=TL3365AF180QG, Pins=4, Price=None, Purchase-URL=https://pricing.snapeda.com/search/part/TL3365AF180QG/?ref=eda, SnapEDA_Link=https://www.snapeda.com/parts/TL3365AF180QG/E-Switch/view-part/?ref=snap, Source=TL3365AF180QG.SchLib
U1: library part CMP-020-00023-1, "RISC Microcontroller, 32-Bit, FLASH, CORTEX-M0 CPU, 48MHz, CMOS", Case/Package=HVQCCN, Clock Frequency=32MHz, Max Operating Temperature=85°C, Max Supply Voltage=3.63V, Min Operating Temperature=-40°C, Min Supply Voltage=1.62V, Nominal Supply Voltage=3.3V, Pins=32, RoHS Compliant=Yes
U2: library part CMP-019-00058-1, "Fixed Positive LDO Regulator, 3.3V, 440V Dropout, PDSO5", RoHS Compliant=Yes
U3: library part CMP-015-00016-2, "1 Channel(s), 8MBps, CMOS, PDCC14", RoHS Compliant=Yes
U4: library part CMP-015-00013-7, "Interface Circuit, PDSO8", Case/Package=SOP, Max Operating Temperature=125°C, Min Operating Temperature=-40°C, Nominal Supply Voltage=3.3V, Pins=8, RoHS Compliant=Yes
U5: library part CMP-016-00012-1, "Comparator, 4 Func, 6000uV Offset-Max, 2500ns Response Time, CMOS", Case/Package=HVQCCN, Max Operating Temperature=125°C, Min Operating Temperature=-40°C, Nominal Supply Voltage=3V, Pins=16, RoHS Compliant=Yes
Y1: library part CMP-003-00030-2, "40 MHz Â±20ppm Crystal 18pF 50 Ohms 4-SMD, No Lead", Case/Package=None, Check_prices=https://www.snapeda.com/parts/RH100-40.000-18-F-2050-TR/Raltron+Electronics/view-part/?ref=eda, Component Type=Standard, Design Item ID=RH100-40.000-18-F-2050-TR, MF="Raltron Electronics", MP=RH100-40.000-18-F-2050-TR, Pins=4, SnapEDA_Link=https://www.snapeda.com/parts/RH100-40.000-18-F-2050-TR/Raltron+Electronics/view-part/?ref=snap, Source=RH100-40.000-18-F-2050-TR.SchLib

## Free pads (board coordinates)
  round 5 hole 2.75 unplated: 2(0,0) 2(32,-23)
  rect 0.8x0.8 smd: 9(4.711,-0.103) 9(5.461,1.397) 9(6.211,-0.103) 9(6.961,1.397) 9(7.711,-0.103)

## Via types
v1: diameter 0.6/0.6 (per signal layer), hole 0.3, Components to Signals, tented both sides, 73 vias
v2: diameter 0.6/0.6 (per signal layer), hole 0.3, Components to Signals, 16 vias
v3: diameter 0.6/0.6 (per signal layer), hole 0.3, Components to Signals, tented bottom, 6 vias

## Nets (pads, with @x,y where several pads share a name; then routed paths per layer and width w, separated by ;. In a path a pad name is that pad's centre, name@x,y a point inside that pad or via, vN(x,y) a via of type N, cw(c..) or ccw(c..) an arc to the next point about the centre after c; other vN are vias at no path point)
2V5_VREF: R9.2 R10.1 U5.2 U5.5 U5.7 | length 8.8
  Components w0.15: U5.2 25.65,-12.505 25.9,-12.755 v1@25.9,-12.797 ; R10.1 R9.2 25.85,-12.85 v1(25.9,-12.8) ; U5.5 27.497,-11.072 v1(27.497,-11.676) ; U5.7 27.505,-10.02 28.059,-10.02 28.278,-9.8 v1(28.4,-9.8)
  Components w0.254: R10.1@25.825,-14.475 R10.1
  Signals w0.15: v1(25.9,-12.8) 26.4,-12.8 27.497,-11.703 v1(27.497,-11.676) ; v1@27.51,-11.69 28.4,-10.8 v1(28.4,-9.8)
3V3_IO: 3V3.1 C2.1 C3.1 C5.1 C6.1 C7.1 C8.1 D2.1 pad.9@5.461,1.397 R11.1 R13.1 R15.1 U1.9 U1.30 U2.5 U3.14 U4.3 | length 21.5
  Components w0.15: U4.3 U4.3@10.121,-14.884 ; v1(20,-10.629) 20.721,-10.629 R13.1 ; v1(22.204,-12.594) 22.748,-12.05 R11.1 R11.1@23.329,-12.179 ; R15.1 v1(23.2,-8.3)
  Components w0.254: v1(4.572,1.397) pad.9@5.461,1.397 ; U4.3@10.121,-14.884 v1@11.532,-14.884 ; v1@11.557,-14.981 11.811,-15.235 C8.1 ; C3.1 12.844,-9.034 12.844,-9.098 12.858,-9.112 12.858,-9.305 v1(12.924,-9.371) ; C3.1@12.496,-8.506 C3.1@12.496,-8.432 ; U3.14 12.555,-19.867 12.555,-18.95 C7.1 ; C7.1@12.573,-18.914 v1(12.573,-18.161) ; v1@12.99,-9.424 12.99,-9.606 U1.30 ; U1.9 16.757,-14.787 16.757,-14.913 v1(16.823,-14.979) ; v1@16.843,-14.958 16.917,-14.958 17.403,-15.444 C2.1 ; C5.1 C5.1@18.971,-20.605 ; D2.1@19.891,-20.605 D2.1 ; U2.5@21,-20.557 21.148,-20.705 U2.5 ; 3V3.1 v1(22.795,-15.587)
  Signals w0.254: v1(4.572,1.397) 5.842,0.127 v1(5.842,-6.604)
  other v1: 18.415,-19.812 20.447,-19.812 11.557,-14.859
5V0_CAN: D4.1 J2.1 | length 2.9
  Components w0.254: J2.1 1.751,-17.463 1.924,-17.636 D4.1
5V0_MAIN: 5V0.1 C4.1 C11.1 D3.1 D4.3 J4.2 R1.1 R9.1 U2.1 U2.3 U5.1 U5.9 | length 5.3
  Components w0.15: v1(26.416,-7.874) 26.416,-7.918 26.65,-8.152 U5.9
  Components w0.254: v1(1.524,-22.098) D4.3 ; C11.1 24.16,-12.748 24.923,-12.748 v1(24.954,-12.717) ; R9.1@24.802,-13.452 R9.1 24.952,-13.598 v1@24.952,-12.719 ; v1@24.95,-12.721 24.95,-12.657 25.15,-12.457 U5.1 ; 5V0.1 v1(25.716,-15.587)
  other v1: 22.098,-24.384
5V0_VBUS: D4.2 J1.A4-B9 J1.B4-A9 | length 3.8
  Components w0.254: v1(0.762,-19.558) 1.117,-19.913 1.117,-20.246 D4.2 ; J1.B4-A9 19.673,-2.417 19.673,-1.782 v1(20.12,-1.335) ; v1@23.657,-1.385 24.127,-1.855 24.127,-2.417 J1.A4-B9
  other v1: 23.657,-1.335
CAN_CLK: U1.8 U3.10 | length 10.9
  Components w0.15: U3.10 13.731,-22.494 v1(14.097,-22.86) ; v1(14.605,-15.748) 14.994,-15.359 14.994,-14.531 U1.8
  Signals w0.15: v1@14.091,-22.854 14.091,-21.291 13.915,-21.115 13.915,-16.438 v1(14.605,-15.748)
CAN_CS: U1.11 U3.13 | length 10.5
  Components w0.15: U3.13 12.545,-20.562 14.526,-20.562 v1(14.544,-20.579) ; U1.11 17.398,-14.014 17.398,-14.21 v1(17.484,-14.296)
  Signals w0.15: v1(14.544,-20.579) 14.646,-20.579 17.498,-17.728 17.498,-14.31 v1(17.484,-14.296)
CAN_H: D1.1 J2.2 R3.1 U4.7 | length 12.4
  Components w0.254: v1(-0.254,-16.256) -0.232,-16.234 1.704,-16.234 J2.2 1.866,-16.072 3.239,-16.072 R3.1 U4.7@4.241,-16.009 ; v1(1.332,-10.48) D1.1 ; U4.7 U4.7@5.329,-16.006
  Signals w0.254: v1(-0.254,-16.256) -0.254,-12.066 v1(1.332,-10.48)
CAN_INT: U1.14 U3.4 | length 18.2
  Components w0.15: v1(8.636,-21.463) 9.017,-21.844 U3.4 ; U1.14 18.587,-13.081 v1(19.05,-13.081)
  Signals w0.15: v1(8.636,-21.463) 8.636,-19.05 15.24,-12.446 18.415,-12.446 v1(19.05,-13.081)
CAN_L: D1.2 J2.3 R3.2 U4.6 | length 9.1
  Components w0.254: v1(0.427,-14.986) 0.439,-14.974 1.714,-14.974 J2.3 1.867,-15.105 R3.2 3.361,-15.045 5.034,-15.045 U4.6@5.093,-14.986 ; v1(1.332,-12.38) 2.398,-12.38 2.424,-12.355 D1.2 ; U4.6 U4.6@5.329,-14.736
  Signals w0.254: v1(0.427,-14.986) 0.427,-13.285 v1(1.332,-12.38)
CAN_MISO: U1.12 U3.12 | length 12.7
  Components w0.15: U3.12 13.994,-21.194 14.26,-21.46 v1(14.946,-21.46) ; U1.12 18.329,-14.237 18.329,-14.519 v1(18.415,-14.605)
  Signals w0.15: v1(14.946,-21.46) 18.415,-17.99 v1(18.415,-14.605)
CAN_MOSI: U1.7 U3.11 | length 9.4
  Components w0.15: U3.11 v1(13.462,-21.844) ; v1(14.261,-14.571) 14.261,-14.564 14.887,-13.938 U1.7
  Signals w0.15: v1(13.462,-21.844) 13.462,-15.368 14.259,-14.571 v1(14.261,-14.571)
CAN_XTAL_IN: C9.1 U3.5 Y1.1 | length 8.4
  Components w0.15: Y1.1 3.645,-20.467 4.12,-19.992 4.136,-19.992 4.375,-19.753 6.3,-19.753 6.389,-19.842 6.409,-19.842 C9.1@6.614,-20.047 ; C9.1 6.723,-20.176 6.968,-20.176 7.366,-20.574 7.366,-22.098 7.762,-22.494 U3.5
CAN_XTAL_OUT: C10.1 U3.6 Y1.3 | length 4.5
  Components w0.15: Y1.3 5.551,-23.123 C10.1 6.625,-23.144 U3.6
DBG_SWC: pad.9@6.211,-0.103 U1.31 | length 13.6
  Components w0.15: pad.9@6.211,-0.103 5.7,-0.614 5.7,-3.037 12.664,-10 12.677,-10 U1.31
DBG_SWD: pad.9@4.711,-0.103 U1.32 | length 14
  Components w0.15: pad.9@4.711,-0.103 5.2,-0.592 5.2,-3.23 U1.32
ENCODER_A: J4.3 R14.1 U5.6 | length 5.4
  Components w0.15: U5.6 28.4,-10.55 28.479,-10.629 32.696,-10.629 J4.3
ENCODER_A_PROT: R13.2 R14.2 U1.18 U5.15 | length 16.7
  Components w0.15: U1.18 18.819,-10 21.05,-10 R13.2 21.711,-10.539 v1(22.376,-10.539) ; v1@22.35,-10.55 22.355,-10.545 24.32,-10.545 U5.15 ; R14.2 v1(29.291,-11.509)
  Signals w0.15: v1(22.376,-10.539) 23.745,-9.171 28.661,-9.171 29.291,-9.801 v1(29.291,-11.509)
ENCODER_B: J4.1 R16.1 U5.8 | length 7.1
  Components w0.15: U5.8 27.669,-9.55 27.724,-9.495 27.724,-9.326 R16.1 28.95,-8.85 31.621,-6.179 32.146,-6.179 J4.1
ENCODER_B_PROT: R15.2 R16.2 U1.19 U5.14 | length 13.7
  Components w0.15: U1.19 18.412,-9.7 22.4,-9.7 22.7,-10 23.15,-10 R15.2 23.3,-10.05 U5.14 ; v1(27.4,-7.95) R16.2
  Signals w0.15: v1(21.9,-9.7) 22.878,-9.7 23.678,-8.9 26.45,-8.9 v1(27.4,-7.95)
ENCODER_X: J4.5 R12.1 U5.4 | length 8.4
  Components w0.15: U5.4 26.65,-13.188 27.178,-13.716 29.718,-13.716 31.502,-15.5 J4.5
ENCODER_X_PROT: R11.2 R12.2 U1.17 U5.16 | length 14.7
  Components w0.15: U1.17 19.34,-11.405 21.895,-11.405 v1(21.9,-11.4) 22.5,-11.4 22.7,-11.2 23.15,-11.2 23.3,-11.05 U5.16 ; R12.2 27.722,-12.628 27.972,-12.628 v1(28.3,-12.3)
  Signals w0.15: v1(21.9,-11.4) 23.929,-13.429 26.449,-13.429 27.578,-12.3 v1(28.3,-12.3)
GND: C1.2 C2.2 C3.2 C4.2 C5.2 C6.2 C7.2 C8.2 C9.2 C10.2 C11.2 D1.3 D2.2 D3.2 D5.2 D6.2 FL1.3 J1.1 J1.2 J1.3 J1.4 J1.A1-B12 J1.B1-A12 J2.4 J2.5 J2.6 J4.4 pad.9@6.961,1.397 R1.2 R4.2 R5.2 R6.2 R7.2 R8.2 R10.2 SW1.1 SW1.2 U1.10 U1.28 U1.33 U2.2 U3.7 U3.15 U4.2 U5.11 U5.12 U5.17 Y1.2 Y1.4 | length 4.1
  Components w0.15: U1.28 15.748,-10.949 v3(15.748,-11.303) ; v3(15.748,-13.081) 15.758,-13.081 U1.10
  Components w0.254: U5.12 25.15,-8.549 U5.12@25.153,-8.546 ; U5.11@25.647,-8.546 25.65,-8.549 U5.11
  other v1: 0,-25 5,-25 10,-25 27.5,-22.5 25,-20 30,-20 32.5,-17.5 27.5,-16.738 30,-15 20,-12.5 0,-10 5,-10 10,-10 30,-10 2.5,-7.5 7.5,-7.5 25,-7.5 22.7,-6.1 0,-5 5,-5 10,-5 15,-5 30,-5 2.5,-2.5 7.5,-2.5 12.5,-2.5 27.5,-2.5 18.4,0 23.4,0 30,0
  other v3: 13.97,-11.303 17.526,-11.303 25.9,-10.3 15.748,-9.525
MCU_ALIVE_H: MCU.1 U1.13 | length 4.5
  Components w0.15: U1.13 19.874,-15.075 MCU.1
NetC1_1: C1.1 U1.29 | length 2.2
  Components w0.254: C1.1 13.004,-8.183 13.598,-8.777 13.598,-9.274 13.605,-9.281 13.605,-9.514 U1.29
NetD5_1: D5.1 J1.B5 R7.1 | length 2.8
  Components w0.15: R7.1 19.499,-4.751 D5.1@19.499,-3.887 ; D5.1 19.846,-3.937 20.127,-3.655 20.127,-2.613 J1.B5
NetD6_1: D6.1 J1.A5 R8.1 | length 2.9
  Components w0.15: J1.A5 23.215,-2.655 23.215,-3.615 23.5,-3.9 23.873,-3.9 D6.1 ; D6.1@23.91,-3.887 23.91,-4.751 R8.1
NetDS1_2: 5V0.2 R4.1 | length 1.3
  Components w0.15: 5V0.2 26.028,-17.602 26.363,-17.602 R4.1
NetDS2_2: 3V3.2 R5.1 | length 1.3
  Components w0.15: 3V3.2 23.107,-17.602 23.442,-17.602 R5.1
NetDS3_2: MCU.2 R6.1 | length 1.3
  Components w0.15: MCU.2 20.186,-17.602 20.521,-17.602 R6.1
NetU3_1: U3.1 U4.1 | length 3.9
  Components w0.15: U3.1 9.49,-19.813 9.145,-19.813 8.844,-19.512 8.844,-17.96 9.13,-17.674 9.871,-17.674 U4.1
NetU3_2: U3.2 U4.4 | length 9
  Components w0.15: U3.2 8.987,-20.544 8.255,-19.812 8.255,-14.795 9.411,-13.639 U4.4
RST: pad.9@7.711,-0.103 SW1.3 SW1.4 U1.26 | length 15
  Components w0.15: pad.9@7.913,-0.305 11.379,-0.305 14.351,-0.305 14.351,-8.138 U1.26
USB_D_N: FL1.2 U1.23 | length 6.6
  Components w0.254: U1.23 17.679,-7.604 21.019,-7.604 21.641,-6.982 FL1.2
USB_D_N_CONN: FL1.5 J1.A7 J1.B7 | length 3.9
  Components w0.254: FL1.5 21.641,-4.409 21.65,-4.4 21.65,-3.495 ; J1.A7 21.65,-3.495 ; J1.B7 22.627,-2.613 22.627,-3.273 22.405,-3.495 21.65,-3.495
USB_D_P: FL1.1 U1.24 | length 5.9
  Components w0.254: U1.24@16.496,-8.079 17.375,-7.2 20.852,-7.2 21.141,-6.911 FL1.1
USB_D_P_CONN: FL1.6 J1.A6 J1.B6 | length 4.6
  Components w0.254: FL1.6 21.141,-4.409 21.15,-4.4 J1.B6 21.152,-2.588 21.152,-1.905 21.258,-1.799 22.042,-1.799 22.148,-1.905 22.148,-2.588 J1.A6
pads on no net: FL1.4 J1. J1.A8 J1.B8 U1.1 U1.2 U1.3 U1.4 U1.5 U1.6 U1.15 U1.16 U1.20 U1.21 U1.22 U1.25 U1.27 U2.4 U3.3 U3.8 U3.9 U4.5 U4.8 U5.3 U5.10 U5.13
copper on no net:
  other v2: 32,-24.95 30.621,-24.379 33.379,-24.379 30.05,-23 33.95,-23 30.621,-21.621 33.379,-21.621 32,-21.05 0,-1.95 -1.379,-1.379 1.379,-1.379 -1.95,0 1.95,0 -1.379,1.379 1.379,1.379 0,1.95

## Polygon pours and split planes (outlines as drawn)
GND on Components "GND_L01_P003" (solid, remove dead copper, pour order 3): 33.274,3.556 cw(c33.274,1.27) 35.56,1.27 35.56,-24.13 cw(c33.147,-24.13) 33.147,-26.543 -1.016,-26.543 cw(c-1.016,-24.003) -3.556,-24.003 -3.556,1.27 cw(c-1.27,1.27) -1.27,3.556
5V0_MAIN on Components "5V0_MAIN_L01_P001" (solid, pour order 1): 21.336,-22.352 21.59,-22.606 21.59,-23.876 21.717,-24.003 22.479,-24.003 22.606,-23.876 22.606,-22.606 22.733,-22.479 23.749,-22.479 23.749,-23.008 25.527,-23.008 25.527,-24.257 25.019,-24.765 20.066,-24.765 19.431,-24.13 19.431,-22.86 19.939,-22.352
3V3_IO on Components "3V3_IO_L01_P000" (solid, pour order 0): 20.701,-21.59 20.447,-21.336 20.447,-21.273 20.447,-20.983 17.272,-20.983 17.272,-19.812 17.653,-19.431 21.209,-19.431 21.59,-19.812 21.59,-21.463 21.463,-21.59
GND on Signals "GND_L04_P004" (solid, remove dead copper, pour order 4): -1.27,3.683 33.02,3.683 cw(c33.02,1.143) 35.56,1.143 35.56,-24.13 cw(c33.147,-24.13) 33.147,-26.543 -1.016,-26.543 cw(c-1.016,-24.003) -3.556,-24.003 -3.556,1.397 cw(c-1.27,1.397)
5V0_VBUS on Supplies (split plane): -1,2.99 29.081,2.99 29.081,-3.375 28.394,-4.062 4.699,-4.062 4.649,-4.071 4.607,-4.099 3.21,-5.496 3.182,-5.538 3.173,-5.588 3.173,-11.43 3.173,-20.826 -2.989,-20.826 -2.989,1 -2.991,1.016 -2.982,1.196 -2.953,1.389 -2.906,1.579 -2.84,1.763 -2.756,1.939 -2.656,2.107 -2.539,2.264 -2.408,2.409 -2.263,2.54 -2.106,2.657 -1.939,2.757 -1.762,2.841 -1.578,2.906 -1.388,2.954 -1.195,2.983 -1.015,2.991
5V0_MAIN on Supplies (split plane): 33.195,2.982 33.389,2.954 33.578,2.906 33.762,2.84 33.939,2.757 34.107,2.656 34.264,2.54 34.408,2.408 34.54,2.264 34.656,2.107 34.757,1.939 34.84,1.762 34.906,1.578 34.954,1.389 34.982,1.195 34.991,1.016 34.99,1 34.99,-23.996 34.991,-24.012 34.982,-24.192 34.954,-24.385 34.906,-24.575 34.84,-24.759 34.757,-24.935 34.656,-25.103 34.54,-25.26 34.408,-25.405 34.264,-25.536 34.107,-25.653 33.939,-25.753 33.762,-25.837 33.578,-25.903 33.389,-25.95 33.195,-25.979 33.007,-25.988 33,-25.987 33,-25.986 32.991,-25.987 32.981,-25.986 32.96,-25.989 -1,-25.989 -1.015,-25.991 -1.195,-25.982 -1.388,-25.953 -1.578,-25.906 -1.762,-25.84 -1.939,-25.756 -2.106,-25.656 -2.263,-25.539 -2.408,-25.408 -2.539,-25.263 -2.656,-25.106 -2.756,-24.939 -2.84,-24.762 -2.906,-24.578 -2.953,-24.388 -2.982,-24.195 -2.991,-24.015 -2.989,-24 -2.989,-21.084 22.479,-21.084 22.529,-21.075 22.571,-21.047 24.192,-19.426 24.22,-19.384 24.229,-19.334 24.229,-4.32 28.448,-4.32 28.498,-4.311 28.54,-4.283 29.302,-3.521 29.33,-3.479 29.339,-3.429 29.339,2.99 32.996,2.99 33,2.99 33.012,2.99 33.015,2.99 33.027,2.99 33.029,2.99
3V3_IO on Supplies (split plane): 23.971,-19.28 22.425,-20.826 3.431,-20.826 3.431,-11.43 3.431,-5.642 4.753,-4.32 23.971,-4.32
GND on GND (split plane): -1,2.99 32.996,2.99 33,2.99 33.012,2.99 33.015,2.99 33.027,2.99 33.029,2.99 33.195,2.982 33.389,2.954 33.578,2.906 33.762,2.84 33.939,2.757 34.107,2.656 34.264,2.54 34.408,2.408 34.54,2.264 34.656,2.107 34.757,1.939 34.84,1.762 34.906,1.578 34.954,1.389 34.982,1.195 34.991,1.016 34.99,1 34.99,-23.996 34.991,-24.012 34.982,-24.192 34.954,-24.385 34.906,-24.575 34.84,-24.759 34.757,-24.935 34.656,-25.103 34.54,-25.26 34.408,-25.405 34.264,-25.536 34.107,-25.653 33.939,-25.753 33.762,-25.837 33.578,-25.903 33.389,-25.95 33.195,-25.979 33.007,-25.988 33,-25.987 33,-25.986 32.991,-25.987 32.981,-25.986 32.96,-25.989 -1,-25.989 -1.015,-25.991 -1.195,-25.982 -1.388,-25.953 -1.578,-25.906 -1.762,-25.84 -1.939,-25.756 -2.106,-25.656 -2.263,-25.539 -2.408,-25.408 -2.539,-25.263 -2.656,-25.106 -2.756,-24.939 -2.84,-24.762 -2.906,-24.578 -2.953,-24.388 -2.982,-24.195 -2.991,-24.015 -2.989,-24 -2.989,1 -2.991,1.016 -2.982,1.196 -2.953,1.389 -2.906,1.579 -2.84,1.763 -2.756,1.939 -2.656,2.107 -2.539,2.264 -2.408,2.409 -2.263,2.54 -2.106,2.657 -1.939,2.757 -1.762,2.841 -1.578,2.906 -1.388,2.954 -1.195,2.983 -1.015,2.991

## Other copper
Supplies (plane layer: these items are gaps in the copper):
  lines w0.254: -3.302,-13.335 -3.302,-20.955 5.715,-20.955 14.224,-20.955 16.002,-20.955 ; 16.002,3.175 29.21,3.175 29.21,-3.429 28.448,-4.191 28.009,-4.191 ; 28.009,-4.191 24.1,-4.191 24.1,-19.334 22.479,-20.955 16.891,-20.955 3.302,-20.955 3.302,-11.43 3.302,-5.588 4.699,-4.191 28.009,-4.191

## Silkscreen, mask and mechanical layers (free items; w line width, h text height)
Top Overlay:
  text "+3V3" at 4.726,1.678 h0.5 r180
  text "GND" at 9.044,1.678 h0.5 r180
  text "RST" at 8.482,0.535 h0.5 r270
  text "SWC" at 6.885,-0.735 h0.5 r180
  text "SWD" at 3.964,-0.789 h0.5 r90
  text "MCU Reset" at 14.5,-1.2 h0.5 r180
  text "USB Debug" at 27.733,-1.5 h0.5 r90
  text "JTAG Interface" at 9.552,-1.751 h0.5 r180
  text "v1.0" at 0.358,-3.91 h0.5 r180
  text "Interface" at 7.319,-3.96 h1 r180
  text "AMT103 Encoder" at 10.235,-5.484 h1 r180
  text "ARCS Lab at UCR" at 9.221,-7.232 h0.75 r180
  text "CAN-FD" at 0.154,-10.26 h0.5 r180
  text "Encoder" at 33.936,-18.388 h0.5 r180
Bottom Overlay:
  drawing of 5 lines, arcs and shapes, not listed
  text "B" at 31.396,-5.4 h0.5 r90
  text "+5V" at 31.396,-7.4 h0.5 r90
  text "A" at 31.396,-10.4 h0.5 r90
  text "GND" at 31.396,-12.4 h0.5 r90
  text "X" at 31.396,-15.4 h0.5 r90
Mechanical 8:
  circle w0.013: c32,-23 r1.25
  circle w0.013: c0,0 r1.25
  lines w0.013: 33,-26.496 ccw(c33,-23.996) 35.5,-23.996 ; 33,3.5 cw(c33,1) 35.5,1 35.5,-24 ; 33.012,3.5 -1,3.5 ccw(c-1,1) -3.5,1 -3.5,-24 ccw(c-1,-24) -1,-26.5 33.02,-26.5